# Altium PCB Jonathan ESC.PcbDoc
Units mil, origin at the board's own origin, x right, y up, seen from the top; angles counter-clockwise.
Board outline 1220.47 x 1968.5 mil, 4 copper layers (Top Layer, GND, GND (Mid2), Bottom Layer), stack 64.567 mil thick; 62 components, 41 nets, 168 pads, 97 vias.
Unrouted connection lines stored in the file: 24.
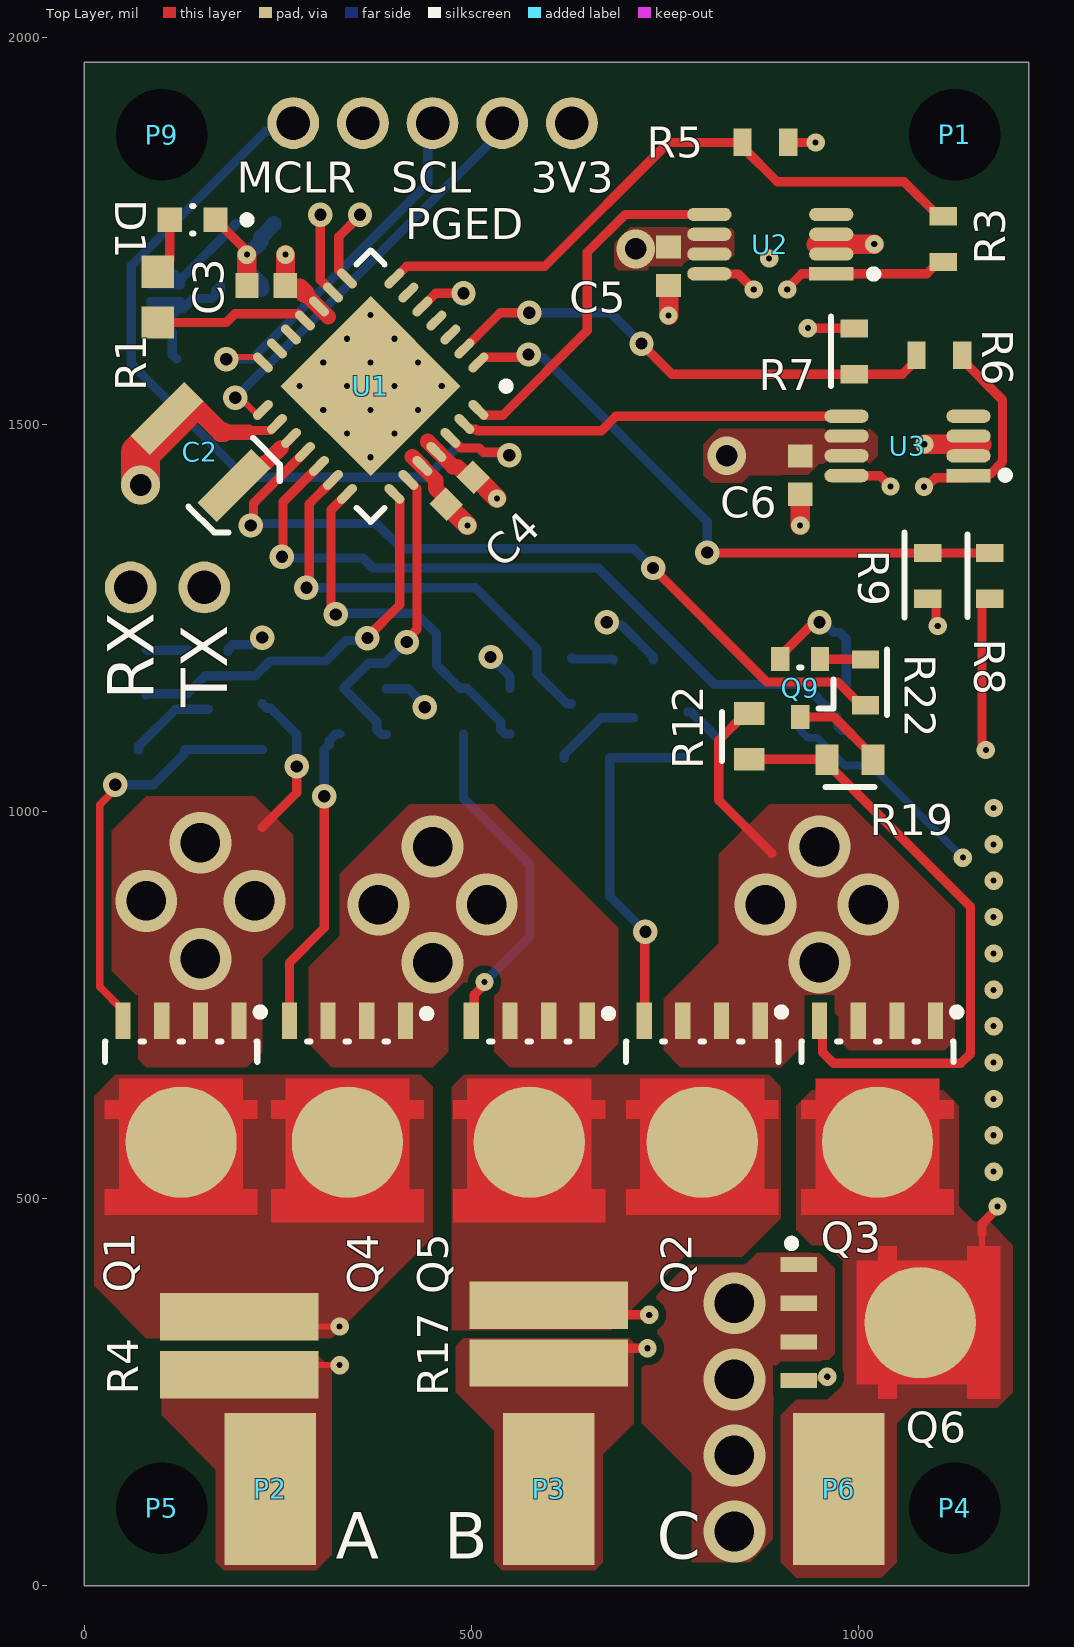
[diagram p0: Top Layer view]
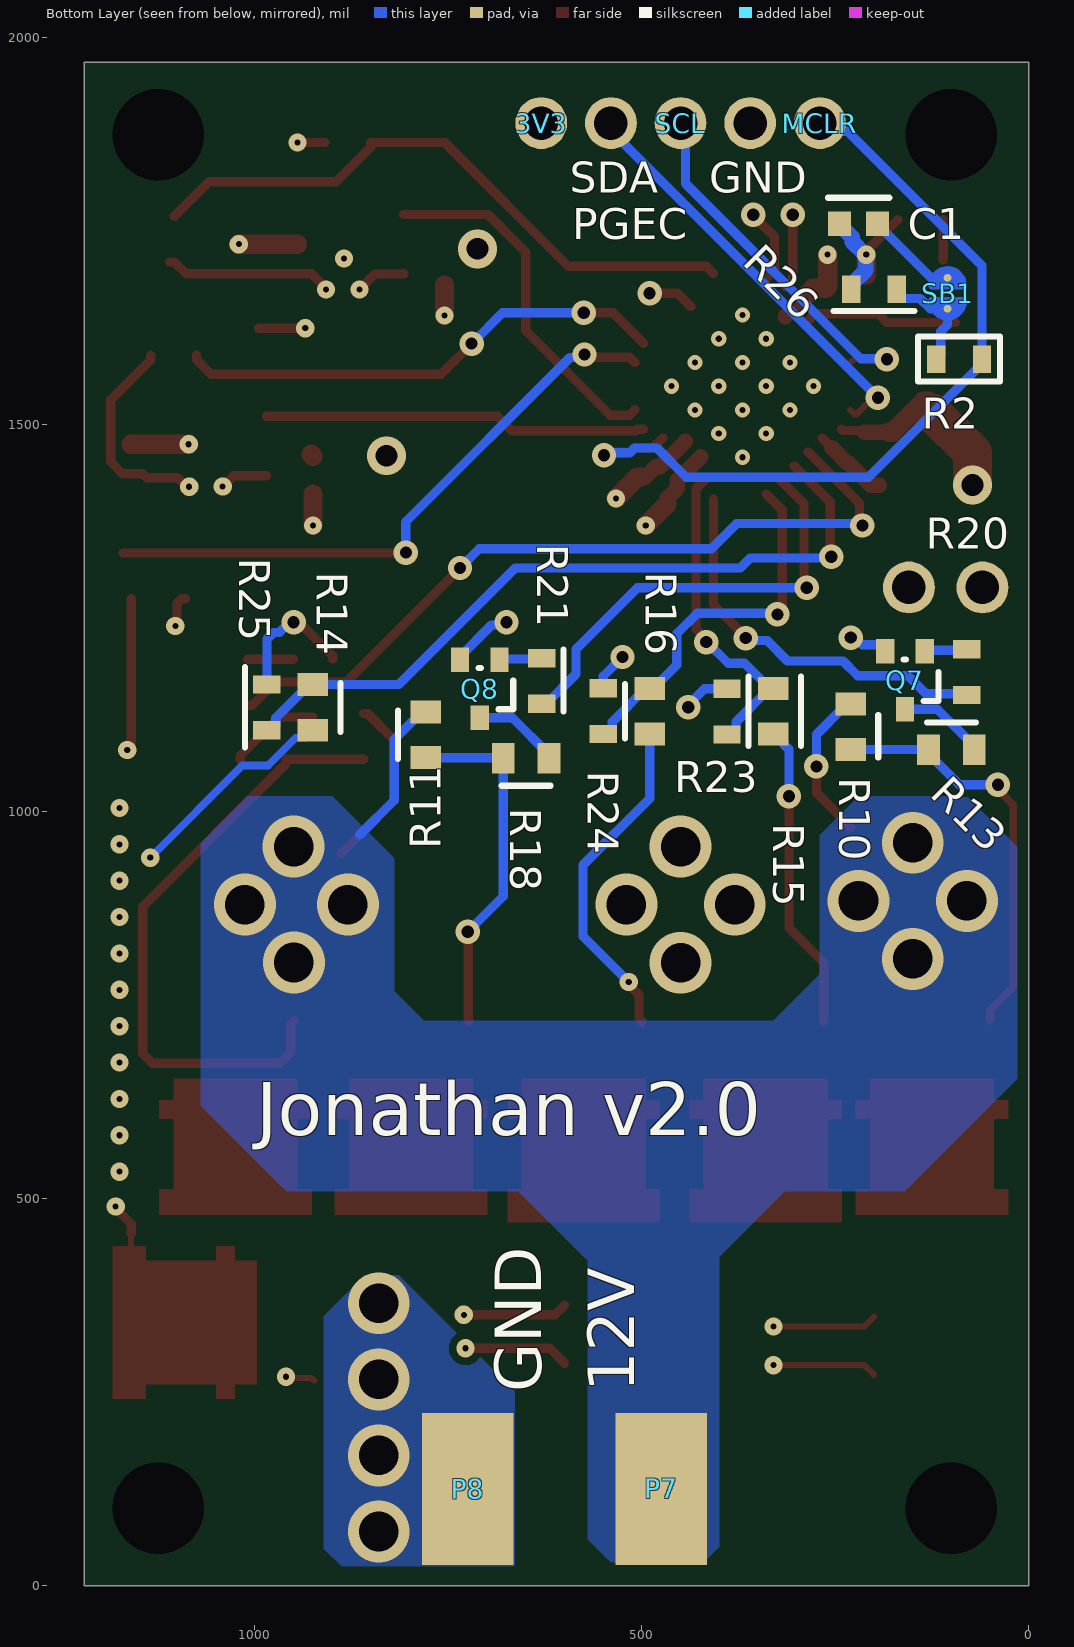
[diagram p1: Bottom Layer view, seen from below]
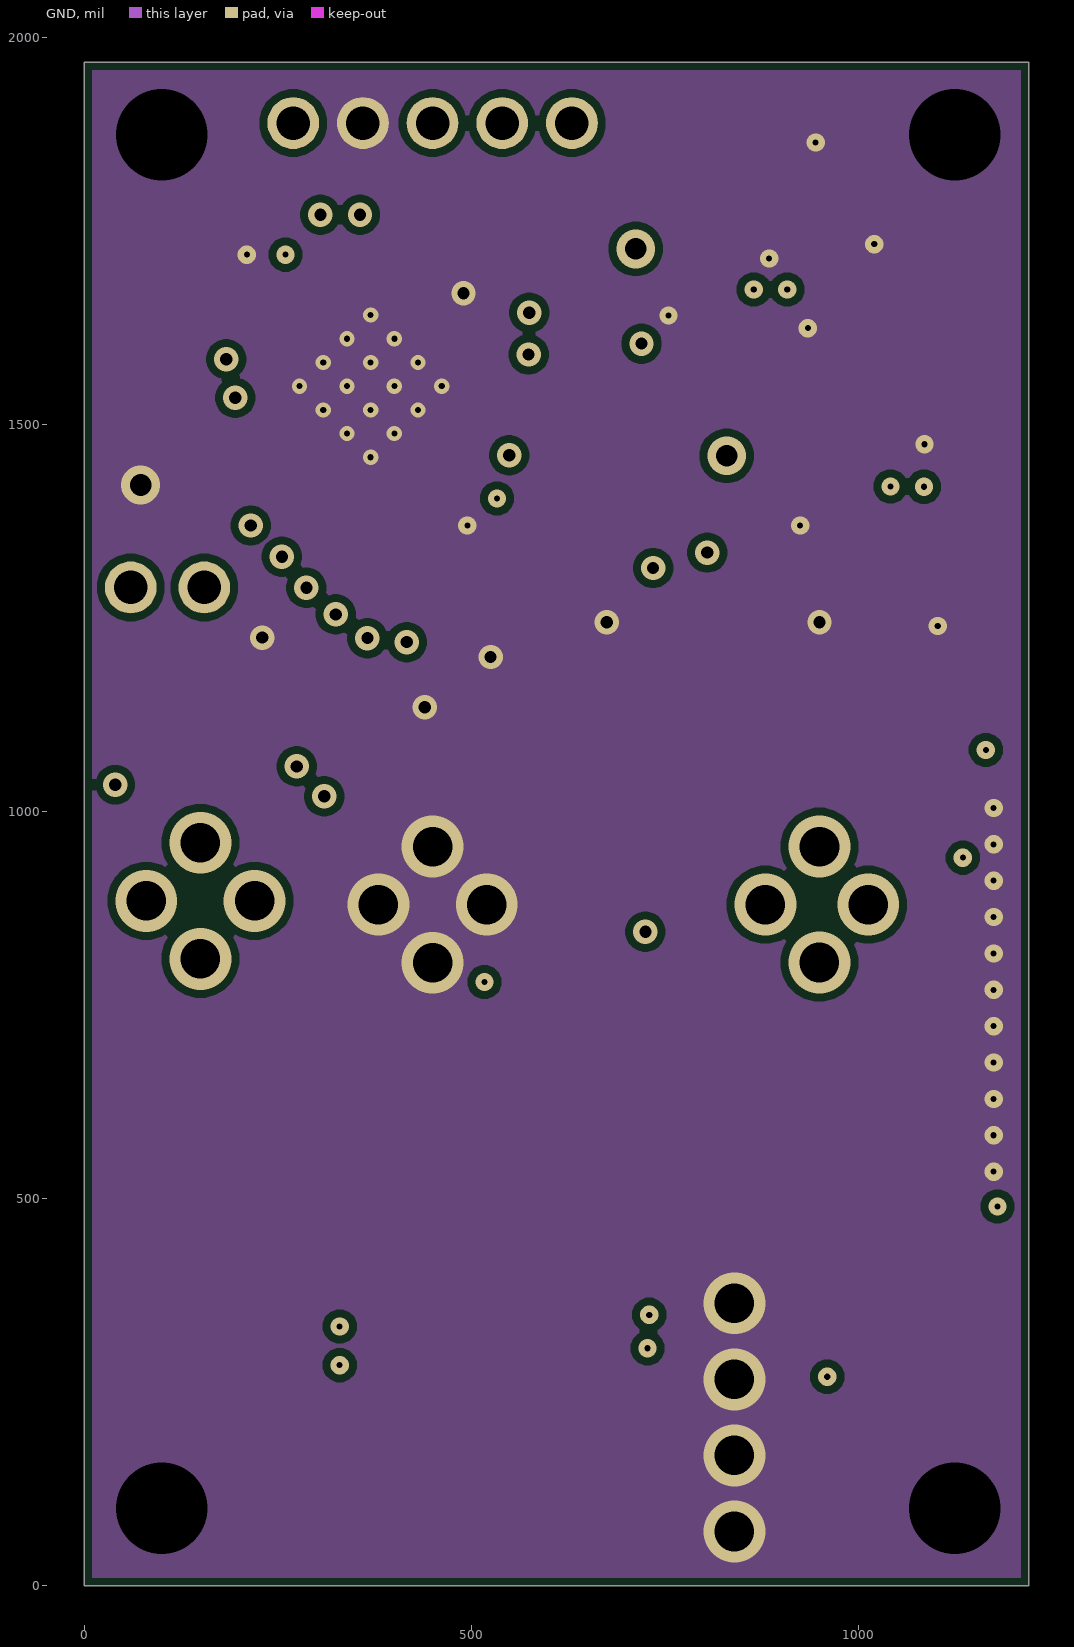
[diagram p2: GND]
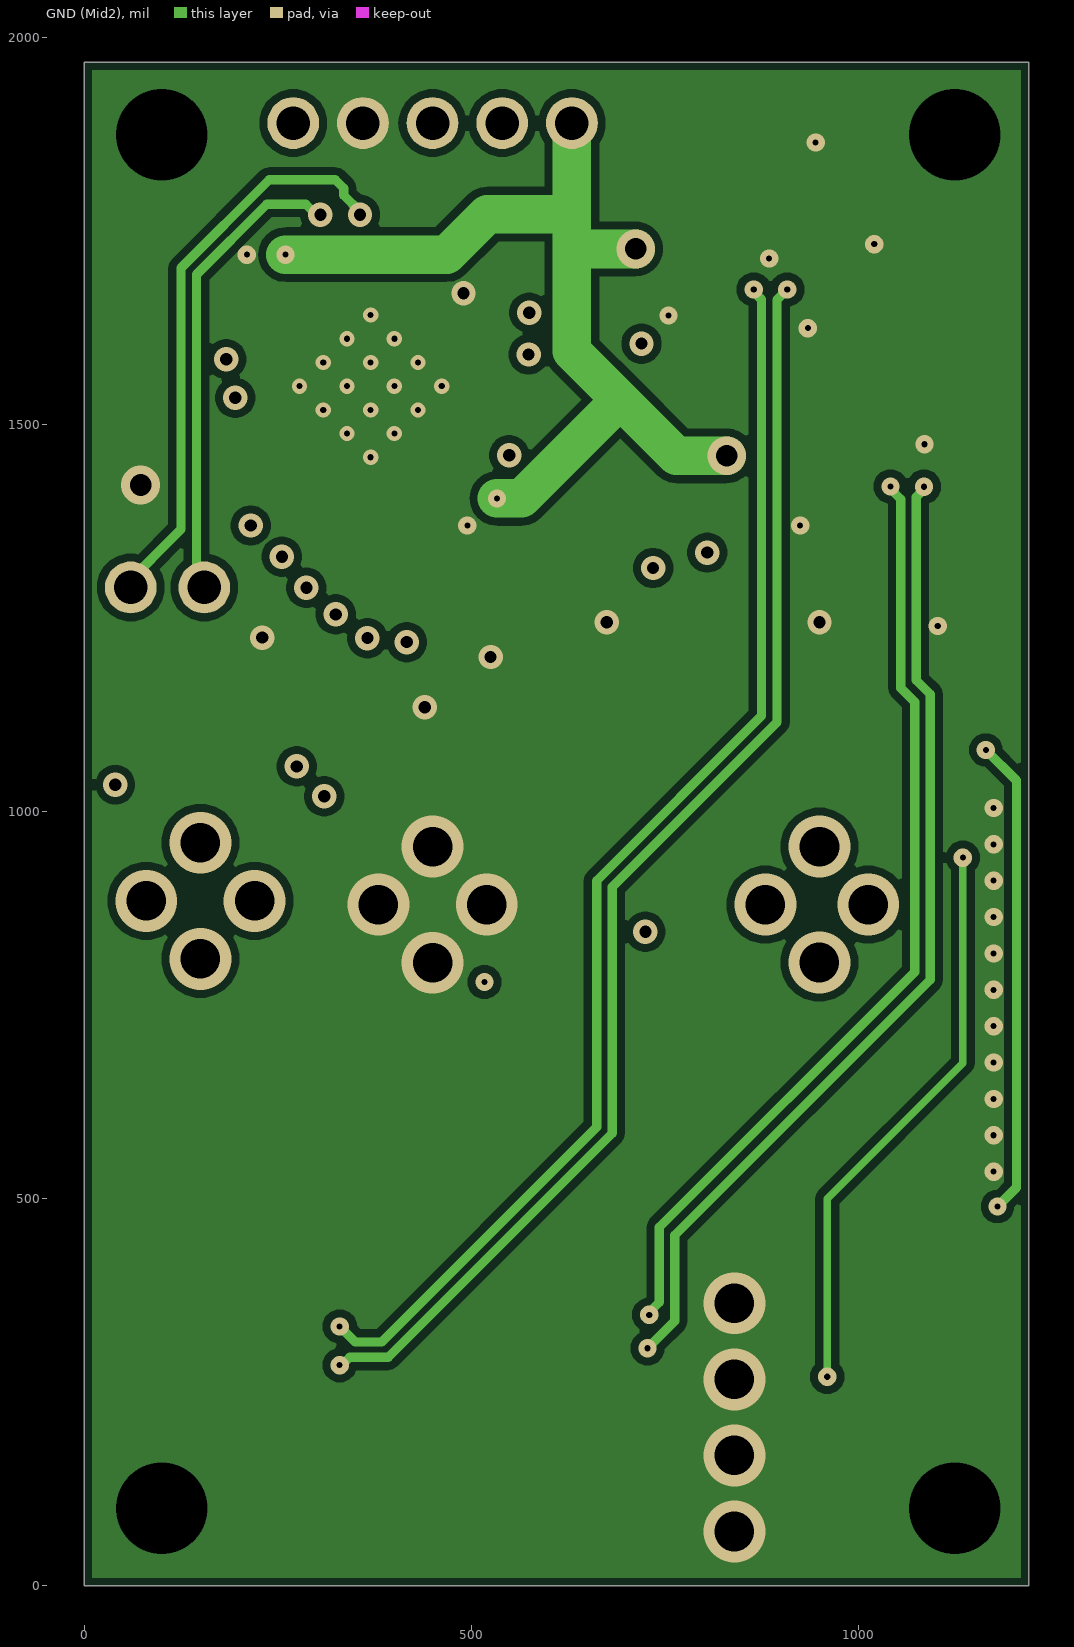
[diagram p3: GND (Mid2)]
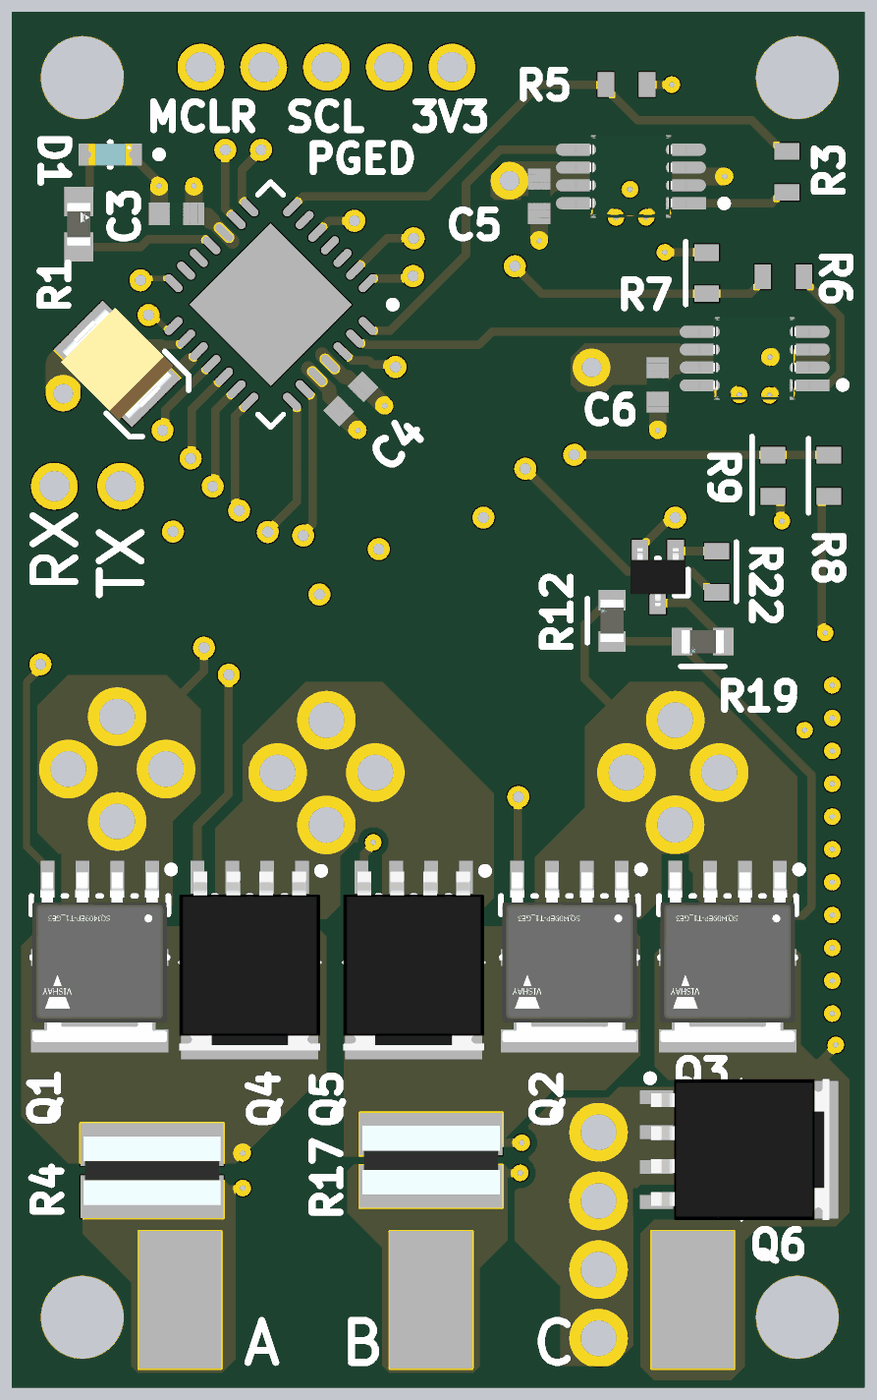
[diagram p4: 3D render of the assembled board from above, using the file's embedded part models]
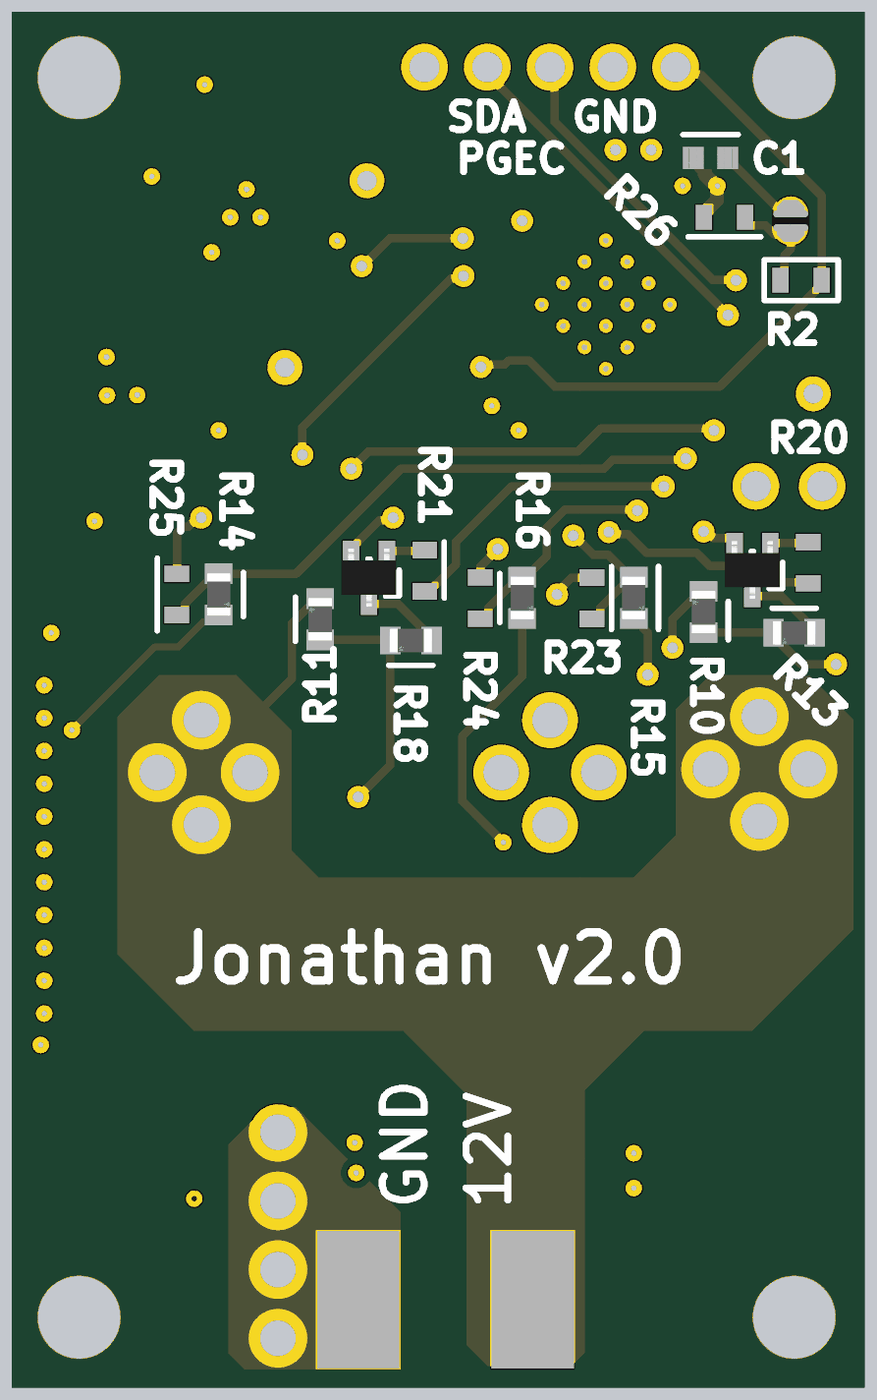
[diagram p5: 3D render of the assembled board from below, using the file's embedded part models]

## Layer stack, top to bottom
Top Solder: solder mask 0.4, Solder Resist, Dk 3.5
Top Layer: signal copper 2.7559
Dielectric 2: prepreg 7.874, FR-4, Dk 4.8
GND: signal copper 0.689
Dielectric 3: core 41.9291, FR-4, Dk 4.8
GND (Mid2): signal copper 0.689
Dielectric 1: prepreg 7.874, FR-4, Dk 4.8
Bottom Layer: signal copper 2.7559
Bottom Solder: solder mask 0.4, Solder Resist, Dk 3.5

## Board outline
0,0 1220.47,0 1220.47,1968.5 0,1968.5

## Design rules (kind name [scope] priority, off if disabled: settings)
BoardOutlineClearance [All] p1: gap=10 ignorepadtopadclearanceinfootprint=FALSE
Clearance [All] p1: gap=10 ignorepadtopadclearanceinfootprint=FALSE except(0: Arc-Hole Track-Hole SMDPad-Hole THPad-Hole Via-Hole Fill-Hole Poly-Hole Region-Hole Text-Hole; 5: SMDPad-SMDPad; 5.91: Arc-Text Track-Text SMDPad-Text THPad-Text; 7.87: Arc-SMDPad Track-SMDPad; 8: Arc-Arc Arc-Track Track-Track; 12.99: Arc-THPad Track-THPad; 19.68: THPad-THPad Via-Via)
HoleSize [All] p1: absolutevalues=TRUE maxlimit=248.03 minlimit=7.87 maxpercent=80.000 minpercent=20.000
HoleToHoleClearance [All] p1: gap=19.68 allowstackedmicrovias=TRUE
MinimumAnnularRing [All] p1: minimumring=5.12
MinimumSolderMaskSliver [All] p1: minsoldermaskwidth=7.87
PlaneConnect [All] p1: pad.planeconnectstyle=Relief pad.reliefexpansion=20 pad.reliefentries=4 pad.reliefconductorwidth=10 pad.reliefairgap=10 via.planeconnectstyle=Direct via.reliefexpansion=20 via.reliefentries=4 via.reliefconductorwidth=10 via.reliefairgap=10
PolygonConnect PolygonConnect_3V3 [InNet('3V3')] p1: connectstyle=Direct reliefconductorwidth=10 reliefentries=4 polygonreliefangle="90 Angle" airgapwidth=10
PolygonConnect PolygonConnectHighCurrent [InNetClass('High Current')] p2: connectstyle=Direct reliefconductorwidth=10 reliefentries=4 polygonreliefangle="90 Angle" airgapwidth=10
PolygonConnect [All] p3: connectstyle=Relief reliefconductorwidth=10 reliefentries=4 polygonreliefangle="90 Angle" airgapwidth=10
RoutingTopology [All] p1: topology=Daisy_MidDriven
RoutingVias [All] p1: holewidth=10 width=25 viastyle="Through Hole" minholewidth=7.87 minwidth=15.75 maxholewidth=248.03 maxwidth=118.11
SilkToSolderMaskClearance [(IsPad OR IsVia)] p1: minsilkscreentomaskgap=5.91 clearancetoexposedcopper=TRUE
SolderMaskExpansion [All] p1: expansion=1.97 istentingtop=FALSE
Width [All] p1: maxlimit=125 minlimit=8 preferedwidth=12 minimp=50.000000 maximp=50.000000 favimp=50.000000
24 further rules are at their usual default settings.

## Classes and differential pairs
net class "High Current": +12 A_OUT B_OUT C_OUT GND NetQ1_5 NetQ2_5
component class "U_Three Phase Inverter": C5 C6 Q1 Q2 Q3 Q4 Q5 Q6 Q7 Q8 Q9 R3 R4 R5 R6 R7 R8 R9 R10 R11 R12 R13 R14 R15 R16 R17 R18 R19 R20 R21 R23 R24 R25 U2 U3
component class U_MCU: C1 C2 C3 C4 D1 R2 R26 SB1 U1
component class "Jonathan ESC": 3V3 GND MCLR P1 P2 P3 P4 P5 P6 P7 P8 P9 RX SCL SDA TX

## Components (designator, comment, footprint, x,y, rotation, side; value= is the part's Value field where it differs from the comment)
3V3 "Through Hole Pad" "THROUGH HOLE PAD" 630,1890 r90 bottom
C1 "100nF" FP-CL10-IPC_C 220,1760 r180 bottom
C2 "10uF Tant" TPSB106K016R0500 150,1465 r315 top
C3 "100nF" FP-CL10-IPC_C 235,1680 r180 top
C4 "100nF" FP-CL10-IPC_C 485,1415 r225 top
C5 "CL10B104MB8NNNC" FP-CL10-IPC_C 755,1705 r270 top
C6 "CL10B104MB8NNNC" FP-CL10-IPC_C 925,1435 r270 top
D1 "LB Q39G-L2OO-35-1" FP-LB_Q39G-MFG 140,1765 r180 top
GND "Through Hole Pad" "THROUGH HOLE PAD" 360,1890 r90 bottom
MCLR "Through Hole Pad" "THROUGH HOLE PAD" 270,1890 r90 bottom
P1 "m2.5 screw hole" "m2.5 screw hole" 1125,1875 r0 top
P2 "Power Pad" "Power Pad" 240,125 r90 top
P3 "Power Pad" "Power Pad" 600,125 r90 top
P4 "m2.5 screw hole" "m2.5 screw hole" 1125,100 r0 top
P5 "m2.5 screw hole" "m2.5 screw hole" 100,100 r0 top
P6 "Power Pad" "Power Pad" 975,125 r90 top
P7 "Power Pad" "Power Pad" 475,125 r90 bottom
P8 "Power Pad" "Power Pad" 725,125 r270 bottom
P9 "m2.5 screw hole" "m2.5 screw hole" 100,1875 r0 top
Q1 "SQJ409EP-T1_GE3" SQJ409EP-T1_GE3 125,615.24 r180 top
Q2 "SQJ409EP-T1_GE3" SQJ409EP-T1_GE3 798.43,615.24 r180 top
Q3 "SQJ409EP-T1_GE3" SQJ409EP-T1_GE3 1025,615.24 r180 top
Q4 "SQJ860EP-T1_GE3" SQJ860EP 340,615.24 r180 top
Q5 "SQJ860EP-T1_GE3" SQJ860EP 575,615.24 r180 top
Q6 "SQJ860EP-T1_GE3" SQJ860EP 1037.88,340 r270 top
Q7 "MMST4401-7-F" MMST4401-7-F 160,1170 r0 bottom
Q8 "MMST4401-7-F" MMST4401-7-F 709.53,1159.06 r0 bottom
Q9 "MMST4401-7-F" MMST4401-7-F 925,1160 r180 top
R1 "MCT0603MD4700DP500" FP-MCT0603-IPC_A 95,1665 r90 top
R2 "270 Ohm" ERJ-PA3J271V 90,1585 r180 bottom
R3 "270 Ohm 0603" ERJ-PA3J271V 1110,1740 r90 top
R4 "ERJB1CFR01U" ERJ-B1CFR01U 200,310 r270 top
R5 "100 Ohm 0603" CRCW0603100RJNEAHP 880,1865 r0 top
R6 "270 Ohm 0603" ERJ-PA3J271V 1105,1590 r180 top
R7 "100 Ohm 0603" CRCW0603100RJNEAHP 995,1595 r90 top
R8 "270 Ohm 0603" ERJ-PA3J271V 1170,1305 r90 top
R9 "100 Ohm 0603" CRCW0603100RJNEAHP 1090,1305 r270 top
R10 "CRCW0603220RFKEA" FP-CRCW0603-e3-MFG 230,1110 r90 bottom
R11 "CRCW0603220RFKEA" FP-CRCW0603-e3-MFG 779.53,1099.53 r90 bottom
R12 "CRCW0603220RFKEA" FP-CRCW0603-e3-MFG 859.41,1097.4 r90 top
R13 "CRCW0603220RFKEA" FP-CRCW0603-e3-MFG 100,1080 r0 bottom
R14 "CRCW0603220RFKEA" FP-CRCW0603-e3-MFG 925,1135 r270 bottom
R15 "CRCW0603220RFKEA" FP-CRCW0603-e3-MFG 330,1130 r270 bottom
R16 "CRCW0603220RFKEA" FP-CRCW0603-e3-MFG 490,1130 r270 bottom
R17 "ERJB1CFR01U" ERJ-B1CFR01U 600,325 r270 top
R18 "CRCW0603220RFKEA" FP-CRCW0603-e3-MFG 649.53,1069.06 r0 bottom
R19 "CRCW0603220RFKEA" FP-CRCW0603-e3-MFG 989.41,1067.4 r180 top
R20 "RCS060310K0JNEA" RCS060310K0JNEA 80,1180.47 r90 bottom
R21 "RCS060310K0JNEA" RCS060310K0JNEA 629.53,1169.06 r90 bottom
R22 "RCS060310K0JNEA" RCS060310K0JNEA 1009.41,1167.4 r90 top
R23 "RCS060310K0JNEA" RCS060310K0JNEA 390,1129.53 r270 bottom
R24 "RCS060310K0JNEA" RCS060310K0JNEA 550,1130 r270 bottom
R25 "RCS060310K0JNEA" RCS060310K0JNEA 985,1135 r270 bottom
R26 "10KΩ" RCS060310K0JNEA 200,1675 r180 bottom
RX "RX" "THROUGH HOLE PAD" 60,1290 r0 top
SB1 "Solder Bridge Open" "Solder Bridge Open" 105,1670 r270 bottom
SCL "Through Hole Pad" "THROUGH HOLE PAD" 450,1890 r90 bottom
SDA "Through Hole Pad" "THROUGH HOLE PAD" 540,1890 r90 bottom
TX "TX" "THROUGH HOLE PAD" 155,1290 r0 top
U1 "DSPIC33FJ09GS302-I/MM" MCHP-QFN-S-MM28_M 370,1550 r225 top
U2 "AD8418BRMZ" FP-RM-8-IPC_C 886.46,1733.54 r180 top
U3 "AD8418BRMZ" FP-RM-8-IPC_C 1063.76,1472.8 r180 top

## Footprints (in the part's own frame and the unit in brackets; to place one, negate y for a bottom-side part, rotate by r counter-clockwise, add the part's x,y. Pads: shape width x height; smd on the part's side, far side on the other; paste and mask are expansions set on the pad)
CRCW0603100RJNEAHP [mm]
  rect 0.6x0.9 smd: 1(-0.75,0) 2(0.75,0)
ERJ-B1CFR01U [mm]
  rect 1.55x5.2 smd: 1(-0.95,0) 2(0.95,0)
  body extent -1.25,-2.5 1.25,2.5, height 0.75
ERJ-PA3J271V [mm]
  rect 0.6x0.9 smd: 1(-0.75,0) 2(0.75,0)
  silkscreen extent -1.35,-0.74 1.35,0.74
FP-CL10-IPC_C [mil]
  rect 29.85x31.97 smd paste+0 mask+0: 1(-24.68,0) 2(24.68,0)
  silkscreen extent -40,33 40,33, body extent -31,-16 31,16, height 36
FP-CRCW0603-e3-MFG [mm]
  rect 0.75x1 smd paste+0 mask+0: 1(-0.75,0) 2(0.75,0)
  silkscreen extent -1.02,-0.9 0.38,-0.9, body extent -0.77,-0.43 0.77,0.43, height 0.5
FP-LB_Q39G-MFG [mm]
  rect 0.8x0.8 smd paste+0 mask+0: 1(-0.75,0) 2(0.75,0)
  silkscreen extent -1.91,-0.45 0.03,0.45, body extent -1.25,-0.55 1.25,0.55, height 0.25
FP-MCT0603-IPC_A [mil]
  rect 41.88x41.82 smd paste+0 mask+0: 1(-32.65,0) 2(32.65,0)
  body extent -73,-41 73,41, height 10
FP-RM-8-IPC_C [mm]
  rect 1.454x0.436 smd paste+0 mask+0: 1(-2,0.975)
  rrect100% 1.454x0.436 smd paste+0 mask+0: 2(-2,0.325) 3(-2,-0.325) 4(-2,-0.975) 5(2,-0.975) 6(2,-0.325) 7(2,0.325) 8(2,0.975)
  silkscreen extent -3.52,0.85 -3.27,1.1, body extent -2.83,-1.6 2.83,1.6, height 0.25
"m2.5 screw hole" [mm] "not through hole"
  round 1.7 hole 3: 1(0,0)
MCHP-QFN-S-MM28_M [mm] "QFN, 28-Leads, Body 6x6mm, Pitch 0.65mm, Thermal Pad 4.175x4.175mm, IPC Low Density"
  oval 0.8x0.3 smd: 1(-3.05,1.95) 2(-3.05,1.3) 3(-3.05,0.65) 4(-3.05,0) 5(-3.05,-0.65) 6(-3.05,-1.3) 7(-3.05,-1.95) 15(3.05,-1.95) 16(3.05,-1.3) 17(3.05,-0.65) 18(3.05,0) 19(3.05,0.65) 20(3.05,1.3) 21(3.05,1.95)
  oval 0.3x0.8 smd: 8(-1.95,-3.05) 9(-1.3,-3.05) 10(-0.65,-3.05) 11(0,-3.05) 12(0.65,-3.05) 13(1.3,-3.05) 14(1.95,-3.05) 22(1.95,3.05) 23(1.3,3.05) 24(0.65,3.05) 25(0,3.05) 26(-0.65,3.05) 27(-1.3,3.05) 28(-1.95,3.05)
  rect 4.18x4.18 smd: 29(0,0)
  silkscreen extent -3.27,-3.15 3.15,3.27, body extent -3,-3 3,3, height 1
MMST4401-7-F [mm] "SOT-323"
  rect 0.6x0.8 smd: 1(-0.65,-0.95) 2(0.65,-0.95) 3(0,0.95)
  silkscreen extent -1.1,-0.67 0.04,0.67, body extent -1,-1.05 1,1.05, height 1.2
"Power Pad" [mm]
  rect 5x3 smd: 1(0,0)
RCS060310K0JNEA [mm]
  rect 0.6x0.9 smd: 1(-0.75,0) 2(0.75,0)
"Solder Bridge Open" [mil]
  round 10 smd mask+0: 1(-20,0) 2(20,0)
  Top Layer region: -10,-20 -20,-20 -30,-10 -30,10 -20,20 -10,20
  Top Layer region: 10,20 20,20 30,10 30,-10 20,-20 10,-20
  Top Layer pour cut-out: 10,20 20,20 30,10 30,-10 20,-20 10,-20
  Top Layer region: 10,20 20,20 30,10 30,-10 20,-20 10,-20
  Top Layer lines w10: 10,20 cw(c10,0) 20,17.32 cw(c10,0) 28.81,6.81 cw(c10,0) 29.49,4.49 cw(c10,0) 30,0 cw(c10,0) 28.23,-8.23 cw(c10,0) 20,-17.32 cw(c10,0) 10,-20 10,-10 10,0 10,20 ; -10,20 ccw(c-10,0) -28.23,8.23 ccw(c-10,0) -29.55,4.23 ccw(c-10,0) -30,0 ccw(c-10,0) -28.13,-8.44 ccw(c-10,0) -20.59,-16.97 ccw(c-10,0) -20,-17.32 ccw(c-10,0) -10,-20 -10,0 -10,20
SQJ409EP-T1_GE3 [mm]
  rect 0.5x1.2 smd paste+0 mask+0: 1(-1.905,-2.915) 2(-0.635,-2.915) 3(0.635,-2.915) 4(1.905,-2.915)
  round 3.655 smd paste+0 mask+0: 5(0,1.07)
  Top Layer region: -2.5,3.45 2.5,3.45 2.5,2.615 2.03,2.615 2.03,0.305 2.5,0.305 2.5,-0.305 2.03,-0.305 2.03,-1.015 -2.03,-1.015 -2.03,-0.305 -2.5,-0.305 -2.5,0.305 -2.03,0.305 -2.03,2.615 -2.5,2.615
  silkscreen extent -2.73,-3.32 2.5,-1.57, body extent -2.73,-3.22 2.73,3.22, height 0.25
SQJ860EP [mm]
  rect 0.5x1.2 smd paste+0 mask+0: 1(-1.905,-2.915) 2(-0.635,-2.915) 3(0.635,-2.915) 4(1.905,-2.915)
  round 3.655 smd paste+0 mask+0: 5(0,1.07)
  Top Layer region: -2.5,3.7 2.5,3.7 2.5,2.615 2.03,2.615 2.03,0.305 2.5,0.305 2.5,-0.305 2.03,-0.305 2.03,-1.015 -2.03,-1.015 -2.03,-0.305 -2.5,-0.305 -2.5,0.305 -2.03,0.305 -2.03,2.615 -2.5,2.615
  silkscreen extent -2.73,-3.27 1.33,-2.23, body extent -2.62,-3.12 2.61,3.38, height 1.13
"THROUGH HOLE PAD" [mm]
  round 1.7 hole 1.1: 1(0,0)
TPSB106K016R0500 [mm]
  rect 0.9x2.5 smd: 1(-1.55,0) 2(1.55,0)
  silkscreen extent 0.9,-1.55 2.51,1.55, body extent -1.75,-1.4 1.75,1.4, height 2.11

## Part data
C1 C3 C4: library part CMP-13271-001724-1, "Cap Ceramic 100nF 50V X7R ±20% Pad SMD 0603 +125°C T/R", Case Code (Imperial)=0603, Case Code (Metric)=1608, Dielectric=X7R, Max Operating Temperature=125°C, Min Operating Temperature=-55°C, Package Quantity=1, Tolerance=20%, Voltage Rating=50V, Capacitance=100nF, Case/Package=0603, Depth=0.8mm, Height=0.8mm, Lead Free="Lead Free", Length=1.6mm, Mount="Surface Mount", Packaging="Tape and Reel", Radiation Hardening=No, Thickness=0.035inch, Voltage Rating (DC)=50V, Width=0.031inch
C2: library part TPSB106K016R0500, "CAP TANT 10UF 10% 16V SMD", Capacitance=10uF, Case Code (Imperial)=1210, Case Code (Metric)=3528, Dielectric Material=Tantalum, ESR (Equivalent Series Resistance)=500mR, Leakage Current=1.6uA, Manufacturer="Kyocera AVX", Max Operating Temperature=125°C, Min Operating Temperature=-55°C, Package Quantity=1, Supplier Part Number 1=478-5230-1-ND, Tolerance=10%, Voltage=16V, Case/Package=1210, Category="Tantalum Capacitors", ComponentLink1Description=https://datasheet.ciiva.com/11793/0900766b80e0c35e-11793349.pdf?src-supplier=RSComponents, ComponentLink1URL=https://datasheet.ciiva.com/11793/0900766b80e0c35e-11793349.pdf?src-supplier=RSComponents, ComponentLink2Description=https://datasheet.ciiva.com/264/tps-264229.pdf?src-supplier=Digi-Key, ComponentLink2URL=https://datasheet.ciiva.com/264/tps-264229.pdf?src-supplier=Digi-Key, ComponentLink3Description=https://datasheet.ciiva.com/7730/1441576-7730869.pdf?src-supplier=Element14, ComponentLink3URL=https://datasheet.ciiva.com/7730/1441576-7730869.pdf?src-supplier=Element14, ComponentLink4Description=https://datasheet.ciiva.com/17339/tps-17339429.pdf?src-supplier=Avnet+Europe, ComponentLink4URL=https://datasheet.ciiva.com/17339/tps-17339429.pdf?src-supplier=Avnet+Europe, ComponentLink5Description=https://datasheet.ciiva.com/264/tps-264230.pdf?src-supplier=Digi-Key, ComponentLink5URL=https://datasheet.ciiva.com/264/tps-264230.pdf?src-supplier=Digi-Key, ComponentLink6Description=https://datasheet.ciiva.com/7730/1680477-7730870.pdf?src-supplier=Element14, ComponentLink6URL=https://datasheet.ciiva.com/7730/1680477-7730870.pdf?src-supplier=Element14, ComponentLink7Description=https://datasheet.ciiva.com/16500/tps-16500230.pdf?src-supplier=Future+Electronics, ComponentLink7URL=https://datasheet.ciiva.com/16500/tps-16500230.pdf?src-supplier=Future+Electronics, ComponentLink8Description=https://datasheet.ciiva.com/264/tps-264231.pdf?src-supplier=Digi-Key, ComponentLink8URL=https://datasheet.ciiva.com/264/tps-264231.pdf?src-supplier=Digi-Key, ComponentLink9Description=https://datasheet.ciiva.com/7730/1441576-7730871.pdf?src-supplier=Element14, ComponentLink9URL=https://datasheet.ciiva.com/7730/1441576-7730871.pdf?src-supplier=Element14, ComponentLink10Description=https://datasheet.ciiva.com/12882/tps-23028-12882919.pdf?src-supplier=Mouser, ComponentLink10URL=https://datasheet.ciiva.com/12882/tps-23028-12882919.pdf?src-supplier=Mouser, ComponentLink11Description=https://datasheet.ciiva.com/28609/packmark-28609112.pdf?src-supplier=Element14, ComponentLink11URL=https://datasheet.ciiva.com/28609/packmark-28609112.pdf?src-supplier=Element14, ComponentLink12Description=https://datasheet.ciiva.com/14599/70001047-14599898.pdf?src-supplier=Allied+Electronics, ComponentLink12URL=https://datasheet.ciiva.com/14599/70001047-14599898.pdf?src-supplier=Allied+Electronics, ComponentLink13Description=https://datasheet.ciiva.com/14605/70001047-14605902.pdf?src-supplier=Allied+Electronics, ComponentLink13URL=https://datasheet.ciiva.com/14605/70001047-14605902.pdf?src-supplier=Allied+Electronics, Depth=2.8mm, Dissipation Factor=6%, Features="General Purpose", Height=1.9mm, Height - Seated (Max)=0.083inch, Lead Free="Lead Free", Length=3.5mm, Manufacturer Part Number=TPSB106K016R0500, Mount="Surface Mount,PCB", Packaging="Tape and Reel", Polarity=Polar, Pricing 1="1=0.45000, 10=0.31900, 50=0.24140, 100=0.21030, 500=0.15580, 1000=0.13243 (USD)", Radiation Hardening=No, REACH SVHC="No SVHC", RoHS=Yes, Stock 1=4, Supplier 1=Digi-Key, Termination=SMD/SMT, Voltage Rating=16V, Voltage Rating (DC)=16V, Width=0.11inch
C5 C6: library part CMP-13271-001724-1, "Cap Ceramic 100nF 50V X7R ±20% Pad SMD 0603 +125°C T/R", Capacitance=100nF, Case Code (Imperial)=0603, Case Code (Metric)=1608, Dielectric=X7R, Max Operating Temperature=125°C, Min Operating Temperature=-55°C, Package Quantity=1, Tolerance=20%, Voltage Rating=50V, Case/Package=0603, Depth=0.8mm, Height=0.8mm, Lead Free="Lead Free", Length=1.6mm, Mount="Surface Mount", Packaging="Tape and Reel", Radiation Hardening=No, Thickness=0.035inch, Voltage Rating (DC)=50V, Width=0.031inch
D1: library part CMP-62016-000036-2, "LED BLUE DIFFUSED 0603 SMD", Case Code (Imperial)=0603, Case Code (Metric)=1608, Color=Blue, Forward Voltage=2.85V, Lens Color=White, Test Current=5mA, Case/Package=0603, Dominant Wavelength=470nm, Height=0.4mm, Length=1.6mm, Lens Size=0.8mm, Lens Style=Flat, Lens Transparency=Diffused, Luminous Flux=0.07lm, Luminous Intensity=29.5mcd, Mount="Surface Mount", Number of LEDs=1, Number of Pins=2, Packaging="Tape and Reel", Radiation Hardening=No, Series="CHIPLED 0603", Viewing Angle=135°, Width=0.8mm
Q4 Q5 Q6: "RESET GENERATOR SOT23", Manufacturer=Vishay, Supplier Part Number 1=SQJ860EP-T1_GE3CT-ND, Category=MOSFETs, Manufacturer Part Number=SQJ860EP-T1_GE3, Pricing 1="1=0.92000, 10=0.79400, 25=0.75720, 100=0.54940, 500=0.45910, 1000=0.39072 (USD)", RoHS=No, Stock 1=12489, Supplier 1=Digi-Key
Q7 Q8 Q9: "TRANS NPN 40V 0.6A SC70-3", Case/Package=SOT-323, Collector Base Voltage (VCBO)=60V, Collector Emitter Breakdown Voltage=40V, Collector-emitter Voltage-Max=750mV, Current Rating=600mA, Emitter Base Voltage (VEBO)=6V, Frequency=250MHz, Manufacturer=Diodes, Max Operating Temperature=150°C, Max Power Dissipation=200mW, Min Operating Temperature=-55°C, Package Quantity=3000, Supplier Part Number 1=MMST4401-FDICT-ND, Category=BJTs, Collector Emitter Voltage (VCEO)=40V, ComponentLink1Description=https://datasheet.ciiva.com/5782/ds30084-5782785.pdf?src-supplier=Avnet, ComponentLink1URL=https://datasheet.ciiva.com/5782/ds30084-5782785.pdf?src-supplier=Avnet, ComponentLink2Description=https://datasheet.ciiva.com/5782/ds30084-5782785.pdf?src-supplier=Farnell, ComponentLink2URL=https://datasheet.ciiva.com/5782/ds30084-5782785.pdf?src-supplier=Farnell, ComponentLink3Description=https://datasheet.ciiva.com/26943/getdatasheetpartid-157337-26943118.pdf?src-supplier=Verical, ComponentLink3URL=https://datasheet.ciiva.com/26943/getdatasheetpartid-157337-26943118.pdf?src-supplier=Verical, ComponentLink4Description=https://datasheet.ciiva.com/17302/ds30084-17302987.pdf?src-supplier=Avnet+Europe, ComponentLink4URL=https://datasheet.ciiva.com/17302/ds30084-17302987.pdf?src-supplier=Avnet+Europe, Element Configuration=Single, Gain Bandwidth Product=250MHz, Height=1mm, hFE Min=20, Lead Free="Lead Free", Length=2.2mm, Manufacturer Part Number=MMST4401-7-F, Max Breakdown Voltage=40V, Max Collector Current=600mA, Max Frequency=250MHz, Mount="Surface Mount", Number of Elements=1, Number of Pins=3, Packaging="Tape and Reel", Polarity=NPN, Power Dissipation=200mW, Pricing 1="1=0.25000, 10=0.20500, 25=0.17160, 100=0.10880, 500=0.07156, 1000=0.04865 (USD)", Radiation Hardening=No, REACH SVHC="No SVHC", RoHS=Yes, Series=-, Stock 1=2577, Supplier 1=Digi-Key, Transition Frequency=250MHz, Voltage Rating (DC)=40V, Weight=0.000212oz, Width=1.35mm
R1: library part CMP-02407-005707-1, "RES SMD 100 OHM 1% 1/8W 0603", Case Code (Imperial)=0603, Case Code (Metric)=1608, Max Operating Temperature=175°C, Max Power Dissipation=150mW, Min Operating Temperature=-55°C, Package Quantity=1, Power Rating=125mW, Resistance=470R, Temperature Coefficient=25ppm/°C, Tolerance=0.5%, Voltage Rating=75V, Case/Package=0603, Composition="Thin Film", Features="Automotive AEC-Q200", Height=0.022inch, Length=0.061inch, Number of Pins=2, Number of Terminations=2, Packaging="Tape and Reel", REACH SVHC="No SVHC", Termination=SMD/SMT, Voltage Rating (DC)=75V, Width=0.033inch
R2 R3 R6 R8: library part ERJ-PA3J271V, "Res Thick Film 0603 270 Ohm 5% 0.25W(1/4W) ±200ppm/C Pad SMD Automotive T/R", Case Code (Imperial)=0603, Case Code (Metric)=1608, Manufacturer=Panasonic, Max Operating Temperature=155°C, Max Power Dissipation=250mW, Min Operating Temperature=-55°C, Resistance=270R, Resistor Type="Thick Film", Supplier Part Number 1=P270BZCT-ND, Temperature Coefficient=200ppm/°C, Tolerance=5%, Case/Package=0603, Category="Chip SMD Resistors", ComponentLink1Description=https://industrial.panasonic.com/cdbs/www-data/pdf/RDO0000/AOA0000C331.pdf?src-supplier=Digi-Key, ComponentLink1URL=https://industrial.panasonic.com/cdbs/www-data/pdf/RDO0000/AOA0000C331.pdf?src-supplier=Digi-Key, ComponentLink2Description=https://industrial.panasonic.com/ww/system/files/data/download/catalog/id_fixed-resistors_e_1.pdf?src-supplier=Digi-Key, ComponentLink2URL=https://industrial.panasonic.com/ww/system/files/data/download/catalog/id_fixed-resistors_e_1.pdf?src-supplier=Digi-Key, Features="Automotive AEC-Q200", Height=0.018inch, Length=0.063inch, Manufacturer Part Number=ERJ-PA3J271V, Number of Terminations=2, Packaging="Tape and Reel", Pricing 1="1=0.10000, 10=0.08600, 100=0.03300, 1000=0.01452, 2500=0.01254 (USD)", RoHS=Yes, Stock 1=14468, Supplier 1=Digi-Key, Width=0.031inch
R4 R17: "Res Thick Film 1020 0.01 Ohm 1% 2W ±350ppm/°C Molded SMD Embossed Carrier T/R", Case Code (Imperial)=1020, Case Code (Metric)=2550, Case/Package=2010, Manufacturer=Panasonic, Max Operating Temperature=155°C, Max Power Dissipation=2W, Min Operating Temperature=-55°C, Package Quantity=5000, Resistance=10mR, Resistance Tolerance=1%, Resistor Type="Thick Film", Supplier Part Number 1=ERJ-B1CFR01U-ND, Temperature Coefficient=350ppm/°C, Voltage Rating=200V, Category="Chip SMD Resistors", ComponentLink1Description=https://datasheet.ciiva.com/43466/1688501-43466679.pdf?src-supplier=Farnell, ComponentLink1URL=https://datasheet.ciiva.com/43466/1688501-43466679.pdf?src-supplier=Farnell, ComponentLink2Description=https://datasheet.ciiva.com/46383/1688501-46383655.pdf?src-supplier=Element14, ComponentLink2URL=https://datasheet.ciiva.com/46383/1688501-46383655.pdf?src-supplier=Element14, ComponentLink3Description=https://datasheet.ciiva.com/46375/1688501-46375722.pdf?src-supplier=Element14, ComponentLink3URL=https://datasheet.ciiva.com/46375/1688501-46375722.pdf?src-supplier=Element14, ComponentLink4Description=https://datasheet.ciiva.com/9194/aoa0000ce23-9194124.pdf?src-supplier=Avnet, ComponentLink4URL=https://datasheet.ciiva.com/9194/aoa0000ce23-9194124.pdf?src-supplier=Avnet, Construction=Rectangular, Contact Plating=Tin, Depth=5mm, Height=0.03inch, Length=2.5mm, Manufacturer Part Number=ERJB1CFR01U, Military Standard=Not, Mount="Surface Mount", Number of Terminations=2, Packaging="Tape and Reel", Power Rating=2W, Pricing 1="5000=0.51892 (USD)", Radiation Hardening=No, REACH SVHC="No SVHC", RoHS=Yes, RoHS Compliant=Yes, Series=ERJ, Supplier 1=Digi-Key, Tolerance=1%, Voltage Rating (DC)=200V, Width=0.197inch
R5 R7 R9: library part CRCW0603100RJNEAHP, "Res Thick Film 0603 100 Ohm 5% 1/4W 200ppm/C Molded SMD SMD Paper T/R", Case Code (Imperial)=0603, Case Code (Metric)=1608, Manufacturer="Vishay Dale", Max Operating Temperature=155°C, Max Power Dissipation=250mW, Min Operating Temperature=-55°C, Package Quantity=5000, Resistance=100R, Resistor Type="Thick Film", Supplier Part Number 1=541-100SACT-ND, Temperature Coefficient=200ppm/°C, Tolerance=5%, Voltage Rating=75V, Case/Package=0603, Category="Chip SMD Resistors", ComponentLink1Description=https://datasheet.ciiva.com/5562/crcwhpe3-46056-5562229.pdf?src-supplier=Mouser, ComponentLink1URL=https://datasheet.ciiva.com/5562/crcwhpe3-46056-5562229.pdf?src-supplier=Mouser, ComponentLink2Description=https://datasheet.ciiva.com/8979/crcwhpe3-8979829.pdf?src-supplier=Avnet, ComponentLink2URL=https://datasheet.ciiva.com/8979/crcwhpe3-8979829.pdf?src-supplier=Avnet, ComponentLink3Description=https://datasheet.ciiva.com/16886/crcwhpe3-16886006.pdf?src-supplier=Avnet+Europe, ComponentLink3URL=https://datasheet.ciiva.com/16886/crcwhpe3-16886006.pdf?src-supplier=Avnet+Europe, Construction=Rectangular, Contact Plating=Tin, Depth=0.85mm, Features="Automotive AEC-Q200", Height=0.45mm, Lead Free="Lead Free", Length=1.6mm, Manufacturer Part Number=CRCW0603100RJNEAHP, Military Standard=Not, Mount="Surface Mount", Number of Terminations=2, Packaging="Tape and Reel", Power Rating=250mW, Pricing 1="1=0.15000, 10=0.12900, 100=0.05060, 1000=0.02119, 2500=0.01942 (USD)", Radiation Hardening=No, RoHS=Yes, RoHS Compliant=Yes, Series=CRCW-HP, Stock 1=23670, Supplier 1=Digi-Key, Termination=SMD/SMT, Weight=7.1E-05oz, Width=0.8mm
R10 R11 R12 R13 R14 R15 R16 R18 R19: library part CMP-2000-03085-2, "RES Thick Film, 220Ω, 1%, 0.1W, 100ppm/°C, 0603", Case Code (Imperial)=0603, Case Code (Metric)=1608, Max Operating Temperature=155°C, Max Power Dissipation=100mW, Min Operating Temperature=-55°C, Package Quantity=10, Resistance=220R, Temperature Coefficient=100ppm/°C, Tolerance=1%, Voltage Rating=75V, Case/Package=0603, Composition="Thick Film", Contact Plating=Tin, Depth=0.85mm, Features="Automotive AEC-Q200", Height=0.45mm, Lead Free="Lead Free", Length=1.55mm, Military Standard=Not, Number of Terminations=2, Packaging="Tape and Reel", Power Rating=100mW, Radiation Hardening=No, Termination=SMD/SMT, Voltage Rating (DC)=75V, Weight=7.1E-05oz, Width=0.033inch
R20 R21 R22 R23 R24 R25: "RES SMD 10K OHM 5% 1/4W 0603", Case Code (Imperial)=0603, Case Code (Metric)=1608, Manufacturer="Vishay Dale", Max Operating Temperature=155°C, Max Power Dissipation=250mW, Min Operating Temperature=-55°C, Resistance=10kR, Resistor Type="Thick Film", Supplier Part Number 1=541-2817-1-ND, Temperature Coefficient=200ppm/°C, Tolerance=5%, Case/Package=0603, Category="Chip SMD Resistors", ComponentLink1Description=http://www.vishay.com/docs/20065/rcse3.pdf?src-supplier=Digi-Key, ComponentLink1URL=http://www.vishay.com/docs/20065/rcse3.pdf?src-supplier=Digi-Key, Features="Automotive AEC-Q200", Height=0.02inch, Length=0.061inch, Manufacturer Part Number=RCS060310K0JNEA, Number of Terminations=2, Packaging="Tape and Reel", Pricing 1="1=0.14000, 10=0.12900, 100=0.04950, 1000=0.02178, 2500=0.01881 (USD)", RoHS=Yes, Stock 1=1896, Supplier 1=Digi-Key, Width=0.033inch
R26: library part RCS060310K0JNEA, "RES SMD 10K OHM 5% 1/4W 0603", Case Code (Imperial)=0603, Case Code (Metric)=1608, Manufacturer="Vishay Dale", Max Operating Temperature=155°C, Max Power Dissipation=250mW, Min Operating Temperature=-55°C, Resistance=10kR, Resistor Type="Thick Film", Supplier Part Number 1=541-2817-1-ND, Temperature Coefficient=200ppm/°C, Tolerance=5%, Case/Package=0603, Category="Chip SMD Resistors", ComponentLink1Description=http://www.vishay.com/docs/20065/rcse3.pdf?src-supplier=Digi-Key, ComponentLink1URL=http://www.vishay.com/docs/20065/rcse3.pdf?src-supplier=Digi-Key, Features="Automotive AEC-Q200", Height=0.02inch, Length=0.061inch, Manufacturer Part Number=RCS060310K0JNEA, Number of Terminations=2, Packaging="Tape and Reel", Pricing 1="1=0.14000, 10=0.12900, 100=0.04950, 1000=0.02178, 2500=0.01881 (USD)", RoHS=Yes, Stock 1=1896, Supplier 1=Digi-Key, Width=0.033inch
RX TX: library part "Through Hole Pad"
U1: library part CMP-0045-00639-1, "16-Bit Microcontroller and Digital Signal Controller with High-Speed PWM, ADC and Comparator, 40 MIPS, 21 I/O, GPIO, -40 to 85 degC, 28-pin QFN (MM28), Tube", Manufacturer=Microchip, ComponentLink1Description="Manufacturer URL", ComponentLink1URL=http://www.microchip.com, ComponentLink2Description=Datasheet, ComponentLink2URL=http://ww1.microchip.com/downloads/en/DeviceDoc/75018c.pdf, ComponentLink3Description="Package Specification", ComponentLink3URL=http://www.microchip.com/stellent/groups/techpub_sg/documents/packagingspec/en012702.pdf, ComponentLink4Description="Product URL", ComponentLink4URL=http://www.microchip.com/dsPIC33FJ09GS302, DatasheetVersion="Rev. C", Mounting Technology="Surface Mount", PackageDescription="28-Lead Plastic Quad Flat, 6 x 6 mm Body, 0.65 mm Pitch", PackageReference=QFN-MM28, PackageVersion=C04-124C, PartNumber=DSPIC33FJ09GS302-I/MM
U2 U3: library part CMP-09116-000026-1, "IC CURR SENSE 1 CIRCUIT 8MSOP", Input Bias Current=130uA, Input Offset Voltage=0.2mV, Manufacturer="Analog Devices", Max Supply Voltage=5.5V, Min Supply Voltage=2.7V, Nominal Supply Current=2.6mA, Package=RM-8, Temperature="-40°C to +125°C", Temperature Range High=+125°C, Temperature Range Low=-40°C, Voltage Gain=0.02V/mV, Automotive=No, Bandwidth=250kHz, Category=IC, ComponentLink2Description=Datasheet, ComponentLink2URL=https://www.analog.com/media/en/technical-documentation/data-sheets/AD8418.pdf, Device Class L1="Integrated Circuits (ICs)", Device Class L2="Linear ICs", Device Class L3=Instrumentation, Digikey Description="IC CURR SENSE 1 CIRCUIT 8MSOP", Height=1.1mm, Ipc Land Pattern Name=SOP65P490X110-8, Lead Free=Yes, Manufacturer Part Number=AD8418BRMZ, Mouser Description="Current Sense Amplifier, Bidirectional, 1, 130 A, MSOP, 8, -40 C, 125 C", Number Of Channels=1, Octopart=https://octopart.com/ad8418brmz-analog+devices-21054230, RoHS=TRUE, Standoff Height=0.05mm

## Via types
v1: diameter 23.62, hole 7.87, Top Layer to Bottom Layer, 36 vias
v2: diameter 31.5, hole 15.75, Top Layer to Bottom Layer, 26 vias
v3: diameter 19.68, hole 7.87, Top Layer to Bottom Layer, 16 vias
v4: diameter 80, hole 51.18, Top Layer to Bottom Layer, 16 vias
v5: diameter 50, hole 28, Top Layer to Bottom Layer, 3 vias

## Nets (pads, with @x,y where several pads share a name; then routed paths per layer and width w, separated by ;. In a path a pad name is that pad's centre, name@x,y a point inside that pad or via, vN(x,y) a via of type N, cw(c..) or ccw(c..) an arc to the next point about the centre after c; other vN are vias at no path point)
3V3: 3V3.1 C3.1 C4.1 C5.1 C6.1 U1.10 U1.25 U2.6 U2.7 U3.6 U3.7 | length 1479.7
  Top Layer w20: 285,1670 315,1640 ; 443.78,1478.78 443.78,1478.47 476.25,1446 481.95,1446 495.49,1432.45 C4.1
  Top Layer w25: C3.1 259.68,1678.94 262.11,1676.51 278.49,1676.51 285,1670 ; C3.1@260,1680.32 v1(260,1720) ; C4.1 505.88,1432.45 v1(533.34,1405) ; v5(712.39,1727.39) v5@717.18,1732.18 ; C6.1 C6.1@927.42,1462.11
  GND (Mid2) w50: v1(260,1720) 468.23,1720 520.59,1772.36 630,1772.36 ; v1(533.34,1405) 565,1405 692.5,1532.5 ; 3V3.1 630,1772.36 ; v5(712.39,1727.39) 630,1727.39 ; v5(830,1460) 765,1460 692.5,1532.5 ; 630,1727.39 630,1772.36 ; 630,1727.39 630,1595 692.5,1532.5
+12: P7.1 Q1.1 Q1.2 Q1.3 Q2.1 Q2.2 Q2.3 Q3.1 Q3.2 Q3.3 R10.2 R11.2 R12.2 | length 624.6
  Top Layer w12: 230,980 274.47,1024.47 v2(274.47,1058.74) ; R12.2 854.49,1126.93 820,1092.44 820,1015 888.49,946.51
  Bottom Layer w12: R10.2 235.8,1133.73 240.72,1133.73 274.47,1099.98 v2(274.47,1058.74) ; R11.2 784.45,1129.06 820,1093.5 820,1015 865,970
  other v4: 949.78,805.22 150,810 880,880 1013,880 80,885 220,885 950,955 150,960
A_OUT: P2.1 R3.1 R4.2 U2.1 | length 2012.7
  Top Layer w8: R4.2 212.4,285 v1(330,285)
  Top Layer w12: v1(908.31,1675) 908.31,1676.43 927.03,1695.15 U2.1 1088.77,1695.15 1104.09,1710.47 R3.1
  GND (Mid2) w12: v1(330,285) 332.84,285 342.84,295 392.63,295 682.19,584.56 682.19,902.97 895,1115.78 895,1661.69 v1(908.31,1675)
AN_AC: U1.28 U2.5 | length 468
  Top Layer w12: U1.28 516.02,1512.55 540.68,1512.55 650,1621.87 650,1722.98 698.94,1771.92 U2.5
AN_AV: R3.2 R5.1 U1.7 | length 809.5
  Top Layer w12: U1.7@407.58,1696.02 416.56,1705 595,1705 755,1865 R5.1 850.47,1859.09 895.26,1814.31 1059.31,1814.31 R3.2@1104.09,1769.53
AN_BC: U1.27 U3.5 | length 495.4
  Top Layer w12: U1.27@498.06,1494.46 505.83,1494.46 507.74,1492.55 668.19,1492.55 686.82,1511.18 U3.5
AN_BV: R6.2 R7.1 U1.2 | length 640.4
  Top Layer w12: U1.2@497.99,1605.61 537.38,1645 v2(575,1645) ; v2(720,1605) 759.53,1565.47 R7.1 1056.85,1565.47 1075.47,1584.09 R6.2
  Bottom Layer w12: v2(575,1645) 680,1645 v2(720,1605)
AN_CV: R8.2 R9.1 U1.1 | length 794.7
  Top Layer w12: U1.1 516.02,1587.45 570.68,1587.45 v2(574.12,1590.88) ; v2(805,1335) 805.47,1334.53 R9.1 R8.2
  Bottom Layer w12: v2(574.12,1590.88) 577.85,1587.15 592.85,1587.15 805,1375 v2(805,1335)
B_OUT: P3.1 R6.1 R17.2 U3.1 | length 1682.9
  Top Layer w12: R17.2 619.15,306.75 v1(727.83,306.75) ; v1@1088.14,1420 1099.97,1431.83 1139.93,1431.83 U3.1 1145.09,1436.99 1171.3,1436.99 1186.5,1452.19 1186.5,1532.12 1134.53,1584.09 R6.1
  GND (Mid2) w12: v1(727.83,306.75) 763,341.91 763,453 1093,783 1093,1152 1075,1170 1075,1406.86 1085,1416.86 v1(1085,1420)
C_OUT: P6.1 Q3.5 Q6.5 R8.1 | length 922.3
  Top Layer w8: 1160,390 1160,455
  Top Layer w12: 1160,455 1160,467.84 1180,487.84 v1(1180,490) ; R8.1@1160,1275.47 1160,1088.14 1165,1083.14 v1(1165,1080)
  GND (Mid2) w12: v1(1165,1080) 1204.47,1040.53 1204.47,514.47 v1(1180,490)
GND: C1.1 C2.1 C3.2 C4.2 C5.2 C6.2 D1.1 GND.1 P1.1 P4.1 P5.1 P8.1 P9.1 Q4.1 Q4.2 Q4.3 Q5.1 Q5.2 Q5.3 Q6.1 Q6.2 Q6.3 Q7.2 Q8.2 Q9.2 R5.2 R7.2 R9.2 R23.1 R24.1 R25.1 R26.1 U1.5 U1.16 U1.24 U1.29 U2.2 U2.3 U3.2 U3.3 | length 1442.5
  Top Layer w12: D1.1 207.78,1726.75 207.78,1722.22 v1(210,1720) ; 212.15,1492.64 240.12,1492.64 U1.16@241.94,1494.46 ; U1.5 436.95,1653 453.94,1670 v2(490,1670) ; Q9.2 899.41,1201.34 939.34,1241.27 946.27,1241.27 v2(950,1245) ; R5.2 v1(945,1865) ; v1(935,1625) R7.2@995,1625 ; R9.2 1094.78,1275.47 1100.59,1269.66 1100.59,1242.22 v1(1102.81,1240)
  Top Layer w20: 179.97,1490.49 212.15,1490.49 ; 423.83,1458.83 454,1428.65 454,1418.05 467.55,1404.51 C4.2
  Top Layer w25: C2.1 129.12,1530.42 136.5,1530.42 176.43,1490.49 179.97,1490.49 ; C3.2@210,1693.71 v1(210,1720) ; C4.2 C4.2 v1(495,1370) ; v1(755,1641.36) C5.2 ; v1(925,1370) C6.2 ; 945.52,1733.54 v1(1020.81,1733.54) ; v1(1085.65,1475) 1160,1475
  Top Layer w50: v5(72.71,1422.29) 72.71,1463.71 C2.1@124.5,1515.5
  Bottom Layer w12: Q7.2 185.59,1210.01 191.4,1215.82 215.4,1215.82 224.69,1225.11 v2(229.96,1225.11) ; R23.1 418.96,1159.06 440,1138.02 v2(440,1135) ; v2(525,1200) 550,1175 R24.1 ; v2(675,1245) 678.73,1241.27 694.24,1241.27 735.12,1200.39 Q8.2 ; v2(950,1245) 955.28,1245 968.52,1231.75 976,1231.75 984.48,1223.27 984.48,1165.05 R25.1
  Bottom Layer w20: R26.1 227.72,1676.81 227.72,1682.72 210.69,1699.74 210.69,1719.31 v1(210,1720) 210.69,1720.69 212.2,1720.69 228.11,1736.61 228.11,1742.37 244.68,1758.94 C1.1
  other v1: 1175,535 1175,582 1175,629 1175,676 1175,723 1175,770 1175,817 1175,864 1175,911 1175,958 1175,1005 885,1715
  other v3: 370,1458.13 339.38,1488.75 400.62,1488.75 308.75,1519.38 370,1519.38 431.25,1519.38 278.13,1550 339.38,1550 400.62,1550 461.87,1550 308.75,1580.62 370,1580.62 431.25,1580.62 339.38,1611.25 400.62,1611.25 370,1641.87
  other v4: 840,70 840,168.33 840,266.67 840,365 450,805 380,880 520,880 450,955
MCLR: MCLR.1 R2.2 U1.26 | length 1077.8
  Top Layer w12: U1.26 473.14,1483.19 486.32,1470 510.39,1470 515.91,1464.48 545.25,1464.48 v2(548.98,1460.75)
  Top Layer w25: MCLR.1@261.98,1881.98 MCLR.1
  Bottom Layer w12: MCLR.1 259.49,1879.49 234.34,1879.49 60.47,1705.63 R2.2 60.47,1579.09 207.28,1432.29 442.65,1432.29 480.36,1470 509.23,1470 515.23,1464 545.73,1464 v2(548.98,1460.75)
NetC1_2: C1.2 SB1.1 | length 119.9
  Bottom Layer w12: SB1.1 122.32,1690 126.38,1690 195.32,1758.94 C1.2
NetD1_2: D1.2 R1.2 | length 51.9
  Top Layer w12: R1.2@110.47,1713.16 D1.2
NetQ1_4: Q1.4 R10.1 R13.2 | length 537.4
  Top Layer w10: v2(40,1035) 40,1029.18 20,1009.18 20,773.78 50,743.78 Q1.4
  Bottom Layer w12: v2(40,1035) 89.45,1035 129.53,1075.08 R13.2 130,1080.47 R10.1
NetQ1_5: Q1.5 Q4.5 R4.1 U2.8 | length 1835.9
  Top Layer w8: Q1.5@125,568.12 Q1.5@128.62,564.5 ; R4.1 212.4,335 v1(330,335)
  Top Layer w12: U2.8 807.86,1695 845,1695 v1(865,1675)
  GND (Mid2) w12: v1(330,335) 350,315 384.34,315 662,592.66 662,911.07 875,1124.07 875,1662.16 865,1672.16 v1(865,1675)
NetQ2_4: Q2.4 R11.1 R18.2 | length 459.6
  Top Layer w12: Q2.4 724.21,730.79 724.21,844.21 v2(725,845)
  Bottom Layer w12: v2(725,845) 679.06,890.94 R18.2 680,1070 R11.1
NetQ2_5: Q2.5 Q5.5 R17.1 U3.8 | length 1423.1
  Top Layer w12: R17.1 612.4,350 v1(730,350) ; U3.8 1027.81,1434.41 v1(1041.7,1420.52)
  GND (Mid2) w12: v1(730,350) 730,353.14 743,366.14 743,463 1073,793 1073,1142 1055,1160 1055,1395 1055,1404.07 1041.7,1417.37 v1(1041.7,1420.52)
NetQ3_4: Q3.4 R12.1 R19.2 | length 801.8
  Top Layer w12: R12.1 959.41,1067.87 R19.2 959.88,1062.48 1145,877.36 1145,687.54 1132.46,675 968.1,675 953.84,689.26 953.84,726.16 Q3.4
NetQ4_4: Q4.4 R15.2 | length 403.4
  Top Layer w8: Q4.4@265,726.88 Q4.4
  Top Layer w12: Q4.4 265,805 310,850 v2(310,1020)
  Bottom Layer w12: v2(310,1020) 310,1080.47 316.31,1086.79 316.31,1091.71 325.08,1100.47 R15.2
NetQ5_4: Q5.4 R16.2 | length 441.1
  Top Layer w8: Q5.4@500,725 Q5.4@502.5,727.5
  Top Layer w12: Q5.4 503.84,733.84 503.84,763.71 516.98,776.86 v1(516.98,780)
  Bottom Layer w12: R16.2 490,1017.26 576,931.26 576,839.02 v1(516.98,780)
NetQ6_4: Q6.4 R14.2 | length 1060.8
  Top Layer w8: Q6.4 926.61,268.49 958.49,268.49 v1(960,270)
  GND (Mid2) w10: v1(960,270) 960,500 1135.26,675.26 v1(1135.26,940.78)
  Bottom Layer w10: R14.2 934.76,1095.71 947.03,1095.71 982.74,1060 1016.04,1060 v1(1135.26,940.78)
NetQ7_1: Q7.1 R20.2 | length 55.5
  Bottom Layer w12: R20.2 81.3,1208.7 133.11,1208.7 Q7.1
NetQ7_3: Q7.3 R13.1 | length 114.2
  Bottom Layer w12: R13.1 70.47,1084.92 118.15,1132.6 Q7.3
NetQ8_1: Q8.1 R21.2 | length 55.3
  Bottom Layer w12: R21.2 630.59,1197.52 682.87,1197.52 Q8.1
NetQ8_3: Q8.3 R18.1 | length 114.2
  Bottom Layer w12: R18.1 620,1073.98 667.68,1121.65 Q8.3
NetQ9_1: Q9.1 R22.2 | length 59
  Top Layer w12: Q9.1 950.83,1197.17 1009.17,1197.17 R22.2
NetQ9_3: Q9.3 R19.1 | length 119.7
  Top Layer w12: Q9.3 968.66,1122.6 1018.94,1072.32 R19.1
NetR1_1: R1.1 U1.11 | length 198.3
  Top Layer w12: R1.1 183.47,1632.35 194.67,1643.55 276.31,1643.55 284.96,1634.91 U1.11
NetR2_1: R2.1 R26.2 SB1.2 | length 149.1
  Bottom Layer w12: 105,1640 105,1629.43 113.72,1620.72 113.72,1590.81 R2.1 ; SB1.2 122.32,1650 127.38,1650 140.66,1663.28 164.66,1663.28 170.47,1669.09 R26.2 ; R26.2@173.43,1672.05 175.47,1674.09 R26.2@175.47,1680
PWM_AH: R20.1 U1.22 | length 512.9
  Top Layer w12: v2(365.79,1224.41) 365.79,1225.79 407.45,1267.45 U1.22@407.45,1403.85
  Bottom Layer w12: R20.1 81.65,1152.6 132.82,1152.6 156.1,1175.88 220.91,1175.88 240.03,1195 311.8,1195 338.07,1221.27 362.65,1221.27 v2(365.79,1224.41)
PWM_AL: R15.1 R23.2 U1.23 | length 412.1
  Top Layer w12: v2(416.71,1219.26) 416.71,1222.75 430,1236.04 430,1417.62 U1.23
  Bottom Layer w12: R23.2 384.09,1100 378.28,1105.81 378.28,1116.17 334.92,1159.53 367.35,1191.95 388.47,1191.95 415.78,1219.26 v2(416.71,1219.26)
PWM_BH: R21.1 U1.20 | length 577
  Top Layer w12: v2(286.94,1289.52) 290.51,1293.09 290.51,1398.13 U1.20
  Bottom Layer w12: v2(286.94,1289.52) 287.04,1289.42 505.58,1289.42 585,1210 585,1178.15 623.62,1139.53 R21.1
PWM_BL: R16.1 R24.2 U1.21 | length 486.8
  Top Layer w12: v2(324.86,1255.14) 324.86,1260.42 318.69,1266.59 318.69,1390.12 U1.21
  Bottom Layer w12: v2(324.86,1255.14) 326.47,1256.75 428.25,1256.75 455,1230 455,1189.61 485.08,1159.53 R16.1 494.92,1159.53 538.28,1116.17 538.28,1106.28 544.09,1100.47 R24.2
PWM_CH: R22.1 U1.18 | length 1017.1
  Top Layer w12: v2(215,1370) 218.73,1373.73 218.73,1398.6 285.09,1464.96 U1.18 ; v2(735,1315) 735,1314.63 881.85,1167.78 973.6,1167.78 1003.5,1137.87 R22.1
  Bottom Layer w12: v2(215,1370) 217.63,1372.63 377.37,1372.63 410,1340 710,1340 v2(735,1315)
PWM_CL: R14.1 R25.2 U1.19 | length 965.5
  Top Layer w12: v2(255.26,1329.71) 256.68,1331.13 256.68,1400.49 U1.19
  Bottom Layer w12: v2(255.26,1329.71) 257.06,1327.92 360.08,1327.92 373,1315 663.75,1315 814.23,1164.53 R14.1 929.92,1164.53 973.28,1121.17 973.28,1111.28 979.09,1105.47 R25.2
RX: RX.1 U1.8 | length 846.9
  Top Layer w12: U1.8 328.74,1699.83 328.74,1743.02 356.18,1770.46 v2(356.18,1771.57)
  GND (Mid2) w12: RX.1@50,1290 125,1365 125,1702.61 239.13,1816.75 324.43,1816.75 335.34,1805.84 335.34,1796.58 356.18,1775.74 v2(356.18,1771.57)
SCL/PGED: SCL.1 U1.14 | length 516.4
  Top Layer w8: v2(183.39,1584.85) 186.13,1587.58 223.85,1587.58 U1.14
  GND (Mid2) w8: SCL.1@420,1890 SCL.1
  Bottom Layer w12: v2(183.39,1584.85) 183.97,1585.43 217.14,1585.43 443.75,1812.04 443.75,1883.75 SCL.1
SDA/PGEC: SDA.1 U1.15 | length 544.9
  Top Layer w8: v2(195,1535) 201.36,1535 222.65,1513.71 225.14,1513.71 U1.15
  Bottom Layer w12: v2(195,1535) 540,1880 SDA.1
TX: TX.1 U1.9 | length 709.9
  Top Layer w12: v2(305,1771.57) 305,1687.51 U1.9@314.46,1678.06
  GND (Mid2) w12: TX.1@145,1285 145,1694.33 235.67,1785 286.29,1785 299.72,1771.57 v2(305,1771.57)
VCAP: C2.2 U1.17 | length 99.3
  Top Layer w12: 254.47,1470.53 267,1483.05 U1.17
  Top Layer w20: C2.2 204.06,1421.85 233.21,1450.99 234.94,1450.99 254.47,1470.53
pads on no net: U1.3 U1.4 U1.6 U1.12 U1.13 U2.4 U3.4

## Polygon pours and split planes (outlines as drawn)
GND on Bottom Layer "GND_L04_P045" (solid, pour order 45): 664,251 814,401 858,401 911,348 911,48 888,25 665,25 664,26
+12 on Bottom Layer "+12_L04_P069" (solid, pour order 69): 420,30 400,50 400,425.15 315.15,510 160,510 15,655 15,955 80,1020 220,1020 270,970 270,790 330,730 782,730 820,768 820,940 900,1020 1010,1020 1070,960 1070,620 960,510 660,510 570,420 570,60 540,30
3V3 on Top Layer "3V3_L01_P078" (solid, pour order 78): 685,1745 700,1760 830,1760 840,1750 840,1720 825,1705 735,1705 730,1700 690,1700 685,1705
3V3 on Top Layer "3V3_L01_P076" (solid, pour order 76): 800,1475 820,1495 1015,1495 1025,1485 1025,1460 1015,1450 950,1450 935,1435 860,1435 850,1425 810,1425 800,1435
GND on Top Layer "GND_L01_P066" (solid, pour order 66): 720,210 720,360 780,420 850,420 860,430 950,430 970,410 970,300 960,290 900,290 890,280 890,60 860,30 785,30 785,145
+12 on Top Layer "+12_L01_P062" (solid, pour order 62): 960,750 975,735 975,705 988.43,691.57 1111.57,691.57 1125,705 1125,875 990,1010 885,1010 820,945 820,830 770,780 748.43,758.43 748.43,691.57 770,670 900,670 930,700 930,740 940,750
GND on Top Layer "GND_L01_P070" (solid, pour order 70): 290,800 330,840 330,920 420,1010 530,1010 690,850 690,780 690,700 660,670 550,670 530,690 530,765 515,780 490,780 470,760 470,690 450,670 320,670 320,670.11 290,700.11
+12 on Top Layer "+12_L01_P072" (solid, pour order 72): 35,795 70,760 70,680 80,670 210,670 230,690 230,810 270,850 270,970 220,1020 80,1020 35,975
C_OUT on Top Layer "C_OUT_L01_P065" (solid, pour order 65): 920,460 940,440 960,440 980,420 980,260 960,240 920,240 900,220 900,30 920,10 1030,10 1050,30 1050,210 1070,230 1180,230 1200,250 1200,440 1170,470 1150,470 1130,490 1130,620 1110,640 940,640 920,620
NetQ2_5 on Top Layer "NETQ2_5_L01_P050" (solid, pour order 50): 475,330 475,645 490,660 885,660 900,645 900,475 850,425 775,425 680,330
B_OUT on Top Layer "B_OUT_L01_P073" (solid, pour order 73): 540,20 530,30 530,200 480,250 480,310 490,320 703.86,320 710,313.86 710,210 670,170 670,30 660,20
A_OUT on Top Layer "A_OUT_L01_P067" (solid, pour order 67): 100,300 100,220 170,150 170,30 180,20 300,20 320,40 320,280 300,300
NetQ1_5 on Top Layer "NETQ1_5_L01_P048" (solid, pour order 48): 80,320 12.5,387.5 12.5,632.5 40,660 435,660 450,645 450,450 320,320
GND on GND "GND_L02_P014" (solid, pour order 14): 0,1968.5 0,0 1220.47,0 1220.47,1968.5
GND on GND (Mid2) "GND_L03_P075" (solid, pour order 75): 0,1968.5 1220.47,1968.5 1220.47,0 0,0

## Silkscreen, mask and mechanical layers (free items; w line width, h text height)
Top Overlay:
  text "PGED" at 415,1740 h40
  text "A" at 325,35 h60
  text "B" at 465,35 h60
  text "C" at 740,35 h60
Bottom Overlay:
  text "PGEC" at 590,1740 h40
  text "Jonathan v2.0" at 998.19,581.81 h68.9
  text "12V" at 510,250 h60 r270
  text "GND" at 630,250 h60 r270
Board:
  the board outline again, w0